# Altium PCB 3channel_thermocouple.PcbDoc
Units mil, origin at the board's own origin, x right, y up, seen from the top; angles counter-clockwise.
Board outline 1772 x 1103 mil, 2 copper layers (Top, Bottom), stack 61.811 mil thick; 14 components, 13 nets, 57 pads, 15 vias.
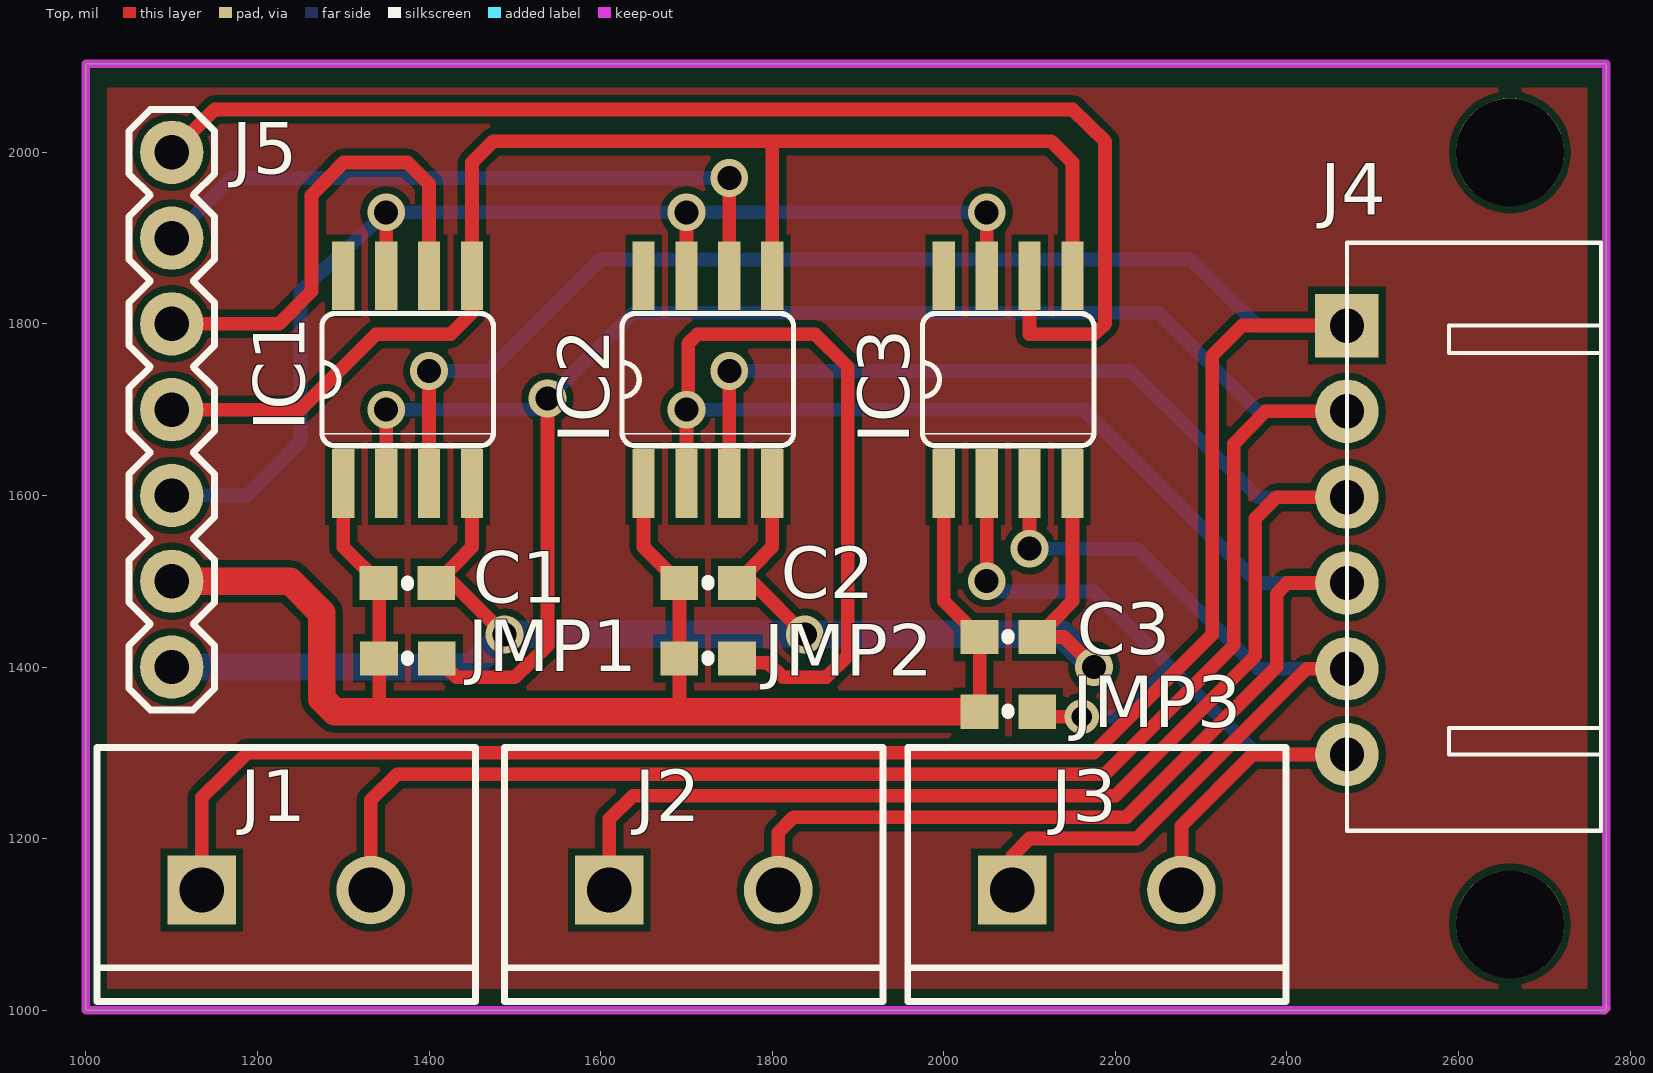
[diagram p0: Top view]
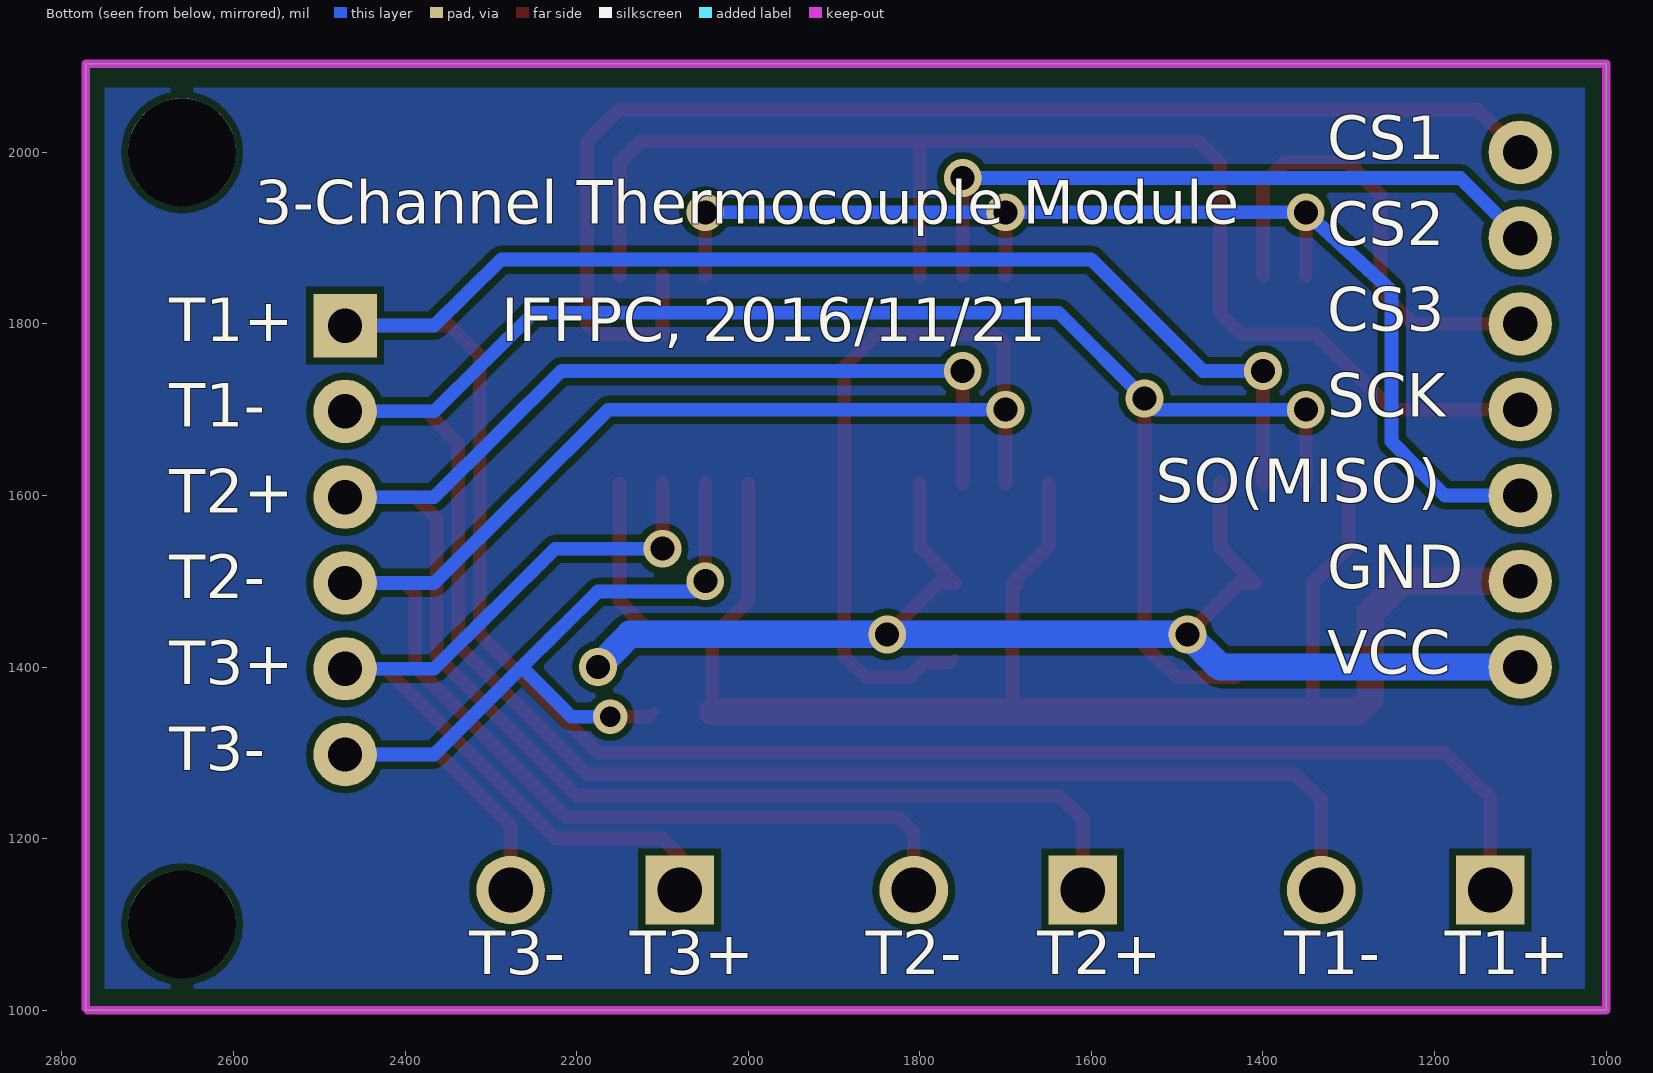
[diagram p1: Bottom view, seen from below]

## Layer stack, top to bottom
Top Solder: solder mask 0.4, Solder Resist, Dk 3.5
Top: signal copper 1.378
Dielectric 1: core 59.0551, FR-4, Dk 4.8
Bottom: signal copper 1.378
Bottom Solder: solder mask 0.4, Solder Resist, Dk 3.5

## Board outline
1000,1000 2772,1000 2772,2103 1000,2103

## Design rules (kind name [scope] priority, off if disabled: settings)
Clearance mdViaVia [IsVia vs IsVia] p1: gap=8
Clearance mdPadVia [IsPad vs IsVia] p2: gap=8
Clearance mdPadPad [IsPad vs IsPad] p3: gap=8
Clearance mdWireVia [(InLayerClass('Signal Layers') AND IsTrack) vs IsVia] p4: gap=8
Clearance mdWirePad [(InLayerClass('Signal Layers') AND IsTrack) vs IsPad] p5: gap=8
Clearance mdWireWire [(InLayerClass('Signal Layers') AND IsTrack) vs (InLayerClass('Signal Layers') AND IsTrack)] p6: gap=8
Clearance [All] p7: gap=8
HoleSize [All] p1: absolutevalues=TRUE maxlimit=100000 minlimit=24 maxpercent=80.000 minpercent=20.000
HoleToHoleClearance [All] p1: gap=8 allowstackedmicrovias=TRUE
PolygonConnect ThermalVias [IsVia] p1: connectstyle=Direct reliefconductorwidth=10 reliefentries=4 polygonreliefangle="90 Angle" airgapwidth=10
PolygonConnect [All] p2: connectstyle=Relief reliefconductorwidth=10 reliefentries=4 polygonreliefangle="90 Angle" airgapwidth=10
RoutingVias [All] p1: holewidth=28 width=50 viastyle="Through Hole" minholewidth=28 minwidth=50 maxholewidth=28 maxwidth=50
SilkToSilkClearance [All] p1 off: silktosilkclearance=10
SilkToSolderMaskClearance [IsPad] p1 off: minsilkscreentomaskgap=10 clearancetoexposedcopper=TRUE
SolderMaskExpansion [All] p1: expansion=4
Width [All] p1: maxlimit=100000 minlimit=10 preferedwidth=10
26 further rules are at their usual default settings.

## Components (designator, comment, footprint, x,y, rotation, side; value= is the part's Value field where it differs from the comment)
C1 "" 0603-CAP 1375,1498 r180 top
C2 "" 0603-CAP 1725,1498 r0 top
C3 "" 0603-CAP 2075,1435 r0 top
IC1 "" SO08 1375,1735 r0 top
IC2 "" SO08 1725,1735 r0 top
IC3 "" SO08 2075,1735 r0 top
J1 "" SCREWTERMINAL-5MM-2 1135,1140 r0 top
J2 "" SCREWTERMINAL-5MM-2 1610,1140 r0 top
J3 "" SCREWTERMINAL-5MM-2 2080,1140 r0 top
J4 "" 1X6-XH-JST-S6B-RIGHTANGLE 2470,1798 r270 top
J5 "" 1X07 1100,1400 r90 top
JMP1 "" 0603-CAP 1375,1410 r0 top
JMP2 "" 0603-CAP 1725,1410 r0 top
JMP3 "" 0603-CAP 2075,1348 r0 top

## Footprints (in the part's own frame and the unit in brackets; to place one, negate y for a bottom-side part, rotate by r counter-clockwise, add the part's x,y. Pads: shape width x height; smd on the part's side, far side on the other; paste and mask are expansions set on the pad)
1X6-XH-JST-S6B-RIGHTANGLE [mil] "1X6-XH-JST-S6B-RIGHTANGLE"
  rect 74x74 hole 40: 1(0,0)
  round 74 hole 40: 2(100,0) 3(200,0) 4(300,0) 5(400,0) 6(500,0)
  silkscreen extent -96,0 589,296
1X07 [mil] "1X07"
  round 74 hole 40: 1(0,0) 2(100,0) 3(200,0) 4(300,0) 5(400,0) 6(500,0) 7(600,0)
  silkscreen extent -50,-50 650,50
0603-CAP [mil] "0603-CAP"
  rect 44x40 smd: 1(-33.46,0) 2(34,0)
  silkscreen extent 0,-1 0,2
SCREWTERMINAL-5MM-2 [mil] "SCREWTERMINAL-5MM-2"
  rect 80x80 hole 52: 1(0,0)
  round 80 hole 52: 2(197,0)
  silkscreen extent -122,-130 319,166
SO08 [mil] "SO08"
  rect 26x80 smd: 1(-75,-121) 2(-25,-121) 3(25,-121) 4(75,-121) 5(75,121) 6(25,121) 7(-25,121) 8(-75,121)
  silkscreen extent -100,-77 100,77

## Part data
C1 C2 C3 JMP1 JMP2 JMP3: library part 0603-CAP
IC1 IC2 IC3: library part SO08
J1 J2 J3: library part SCREWTERMINAL-5MM-2
J4: library part 1X6-XH-JST-S6B-RIGHTANGLE
J5: library part 1X07

## Free pads (board coordinates)
  round 126 hole 126: 1(2660,1100) 1(2660,2000)

## Via types
v1: diameter 44/44 (per signal layer), hole 28, Top to Bottom, 14 vias
v2: diameter 40/40 (per signal layer), hole 24, Top to Bottom, 1 vias

## Nets (pads, with @x,y where several pads share a name; then routed paths per layer and width w, separated by ;. In a path a pad name is that pad's centre, name@x,y a point inside that pad or via, vN(x,y) a via of type N, cw(c..) or ccw(c..) an arc to the next point about the centre after c; other vN are vias at no path point)
GND: C1.2 C2.1 C3.1 IC1.1 IC2.1 IC3.1 J5.2 JMP1.1 JMP2.1 JMP3.1 | length 1922.7
  Top w16: IC1.1 1300,1540 1342,1498 1342,1410 1342,1352 1338,1348 ; IC2.1 1650,1540 C2.1@1692,1498 ; 1688,1348 1692,1352 1692,1410 C2.1@1692,1498 ; C2.1@1688,1494 C2.1@1692,1498 ; IC3.1 2000,1477 2042,1435 JMP3.1@2042,1348
  Top w32: J5.2 1238,1500 1275,1463 1275,1363 1290,1348 1338,1348 1688,1348 JMP3.1@2042,1348
MAX6675_CS1: IC1.6 J5.5 | length 561.1
  Top w16: J5.5 1225,1800 1263,1838 1263,1950 1300,1988 1375,1988 1400,1963 IC1.6
MAX6675_CS2: IC2.6 J5.6 | length 793
  Top w16: IC2.6 v1(1750,1970)
  Bottom w16: J5.6 1170,1970 v1(1750,1970)
MAX6675_CS3: IC3.6 J5.7 | length 1497.4
  Top w16: J5.7 1150,2050 2150,2050 2188,2013 2188,1800 2175,1788 2100,1788 IC3.6
MAX6675_DO: IC1.7 IC2.7 IC3.7 J5.3 | length 1409.3
  Top w16: IC1.7 v1(1350,1930) ; IC2.7 v1(1700,1930) ; IC3.7 v1(2050,1930)
  Bottom w16: J5.3 1188,1600 1250,1663 1250,1838 v1(1350,1930) v1(1700,1930) v1(2050,1930)
MAX6675_SCK: IC1.5 IC2.5 IC3.5 J5.4 | length 1581.5
  Top w16: J5.4 1250,1700 1338,1788 1425,1788 1450,1813 IC1.5 1450,1988 1475,2013 1800,2013 ; IC2.5 1800,2013 ; IC3.5 2150,1988 2125,2013 1800,2013
T1N: IC1.2 J1.2 J4.2 JMP1.2 | length 3309.3
  Top w10: JMP1.2 JMP1.2@1414,1405
  Top w16: J1.2 1332,1245 1363,1275 2188,1275 2338,1425 2338,1660 2375,1698 J4.2 ; IC1.2 v1(1350,1700) ; JMP1.2@1414,1405 1432,1388 1500,1388 1538,1425 v1(1538,1713)
  Bottom w16: v1(1350,1700) 1525,1700 v1(1538,1713) 1638,1813 2250,1813 2366,1698 J4.2
T1P: IC1.3 J1.1 J4.1 | length 3147.4
  Top w16: J1.1 1135,1248 1188,1300 2175,1300 2313,1438 2313,1763 2348,1798 J4.1 ; IC1.3 v1(1400,1745)
  Bottom w16: v1(1400,1745) 1470,1745 1600,1875 2288,1875 2366,1798 J4.1
T2N: IC2.2 J2.2 J4.4 JMP2.2 | length 2609.1
  Top w10: v1(1700,1700) v1@1702,1702 ; JMP2.2 JMP2.2@1765,1405
  Top w16: IC2.2 v1(1700,1700) ; v1@1702,1702 1702,1777 1713,1788 1850,1788 1888,1750 1888,1413 1863,1388 1813,1388 1795,1405 JMP2.2@1765,1405 ; J2.2 1807,1207 1825,1225 2213,1225 2388,1400 2388,1485 2400,1498 J4.4
  Bottom w16: v1(1700,1700) 2163,1700 2366,1498 J4.4
T2P: IC2.3 J2.1 J4.3 | length 2103.4
  Top w16: J2.1 1610,1223 1638,1250 2200,1250 2363,1413 2363,1573 2388,1598 J4.3 ; IC2.3 v1(1750,1745)
  Bottom w16: v1(1750,1745) 2218,1745 2366,1598 J4.3
T3N: IC3.2 J3.2 J4.6 JMP3.2 | length 1100.7
  Top w10: JMP3.2 JMP3.2@2116,1342
  Top w16: v1(2050,1500) IC3.2 ; JMP3.2@2116,1342 v2(2161,1342) ; J3.2 2277,1215 2360,1298 J4.6
  Bottom w16: v1(2050,1500) 2063,1488 2175,1488 2264,1400 ; v2(2161,1342) 2206,1342 2264,1400 ; J4.6 2366,1298 2264,1400
T3P: IC3.3 J3.1 J4.5 | length 1024
  Top w16: J3.1 2080,1180 2100,1200 2225,1200 2423,1398 J4.5 ; v1(2100,1538) IC3.3
  Bottom w16: v1(2100,1538) 2225,1538 2366,1398 J4.5
VCC: C1.1 C2.2 C3.2 IC1.4 IC2.4 IC3.4 J5.1 | length 1856.1
  Top w16: IC1.4 1450,1540 1409,1498 1428,1498 v1(1488,1438) ; IC2.4 1800,1540 C2.2 1778,1498 v1(1838,1438) ; IC3.4 2150,1477 C3.2 2140,1435 v1(2175,1400)
  Bottom w32: J5.1 1450,1400 v1(1488,1438) v1(1838,1438) 2138,1438 v1(2175,1400)
pads on no net: IC1.8 IC2.8 IC3.8
copper on no net: | length 2.8
  Top w10: 2770,1000 2772,1002

## Polygon pours and split planes (outlines as drawn)
no net on Top "Top-No Net" (solid, pour order 2): 1025,1025 2750,1025 2750,2075 1025,2075 1025,1025
no net on Bottom "Top-No Net" (solid, pour order 4): 1025,2075 2750,2075 2750,1025 1025,1025 1025,2075

## Keep-outs
Keep-Out Layer:
  lines w0: 1000,1000 1000,2103 2772,2103 2772,1000 1000,1000
  lines w10: 2770,1000 1000,1000 1000,2103 2772,2103 2772,1002

## Silkscreen, mask and mechanical layers (free items; w line width, h text height)
Bottom Overlay:
  text "CS1" at 1325,1975 h86.8
  text "3-Channel Thermocouple Module" at 2575,1900 h86.8
  text "CS2" at 1325,1875 h86.8
  text "CS3" at 1325,1775 h86.8
  text "IFFPC, 2016/11/21" at 2288,1763 h86.8
  text "T1+" at 2675,1763 h86.8
  text "SCK" at 1325,1675 h86.8
  text "T1-" at 2675,1663 h86.8
  text "SO(MISO)" at 1525,1575 h86.8
  text "T2+" at 2675,1563 h86.8
  text "GND" at 1325,1475 h86.8
  text "T2-" at 2675,1463 h86.8
  text "VCC" at 1325,1375 h86.8
  text "T3+" at 2675,1363 h86.8
  text "T3-" at 2675,1263 h86.8
  text "T1+" at 1188,1025 h86.8
  text "T1-" at 1375,1025 h86.8
  text "T2+" at 1663,1025 h86.8
  text "T2-" at 1863,1025 h86.8
  text "T3+" at 2138,1025 h86.8
  text "T3-" at 2325,1025 h86.8
Dimension:
  the board outline again, w0

## Text inside footprints (layer, text, board x,y; h text height)
C1: tNames ">NAME" at 1410,1468 h13.6 r180; tValues ">VALUE" at 1415,1543 h13.6 r180
C2: tNames ">NAME" at 1690,1528 h13.6; tValues ">VALUE" at 1685,1453 h13.6
C3: tNames ">NAME" at 2040,1465 h13.6; tValues ">VALUE" at 2035,1390 h13.6
IC1: tNames ">NAME" at 1260,1660 h77.5 r90; tValues ">VALUE" at 1530,1655 h77.5 r90
IC2: tNames ">NAME" at 1610,1660 h77.5 r90; tValues ">VALUE" at 1880,1655 h77.5 r90
IC3: tNames ">NAME" at 1960,1660 h77.5 r90; tValues ">VALUE" at 2230,1655 h77.5 r90
J1: tNames ">NAME" at 1085,1240 h24.8; tValues ">VALUE" at 1085,1190 h24.8
J2: tNames ">NAME" at 1560,1240 h24.8; tValues ">VALUE" at 1560,1190 h24.8
J3: tNames ">NAME" at 2030,1240 h24.8; tValues ">VALUE" at 2030,1190 h24.8
J5: tNames ">NAME" at 1028,1347 h77.5 r90; tValues ">VALUE" at 1225,1350 h77.5 r90
JMP1: tNames ">NAME" at 1340,1440 h13.6; tValues ">VALUE" at 1335,1365 h13.6
JMP2: tNames ">NAME" at 1690,1440 h13.6; tValues ">VALUE" at 1685,1365 h13.6
JMP3: tNames ">NAME" at 2040,1378 h13.6; tValues ">VALUE" at 2035,1303 h13.6